# Altium PCB 凌霄底板插座PCB.PcbDoc
Units mil, origin at the board's own origin, x right, y up, seen from the top; angles counter-clockwise.
Board outline 6000 x 4000 mil, 2 copper layers (Top Layer, Bottom Layer); 1 components, 0 nets, 72 pads, 0 vias.
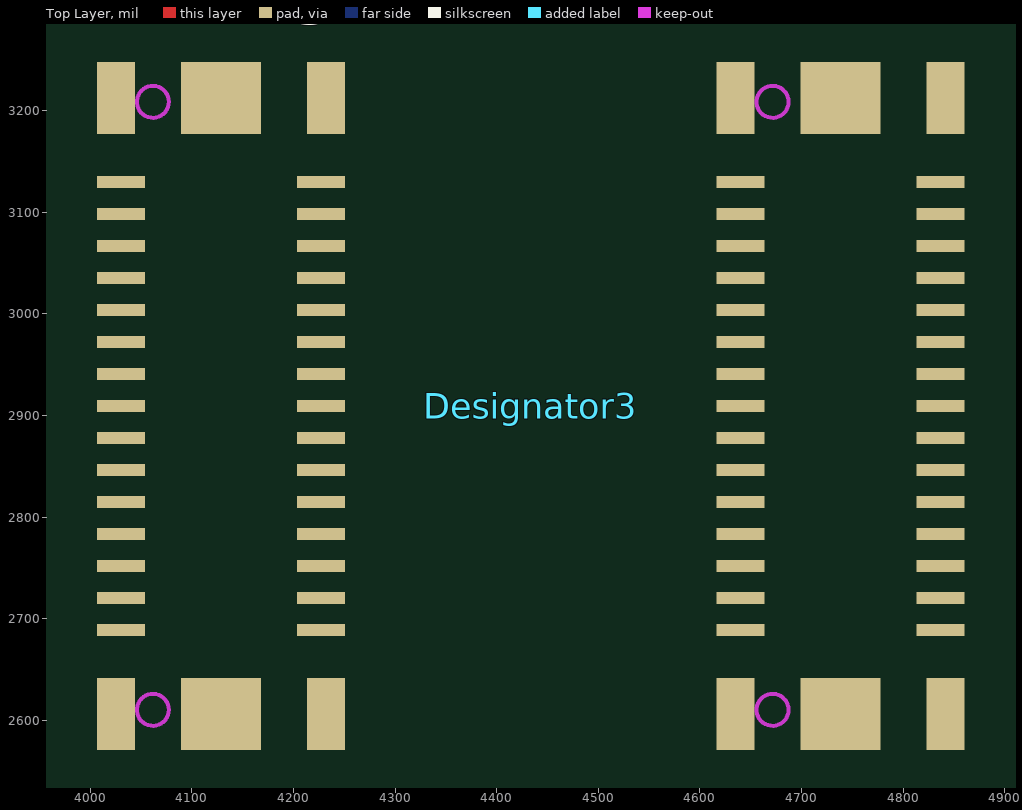
[diagram p0: Top Layer view]
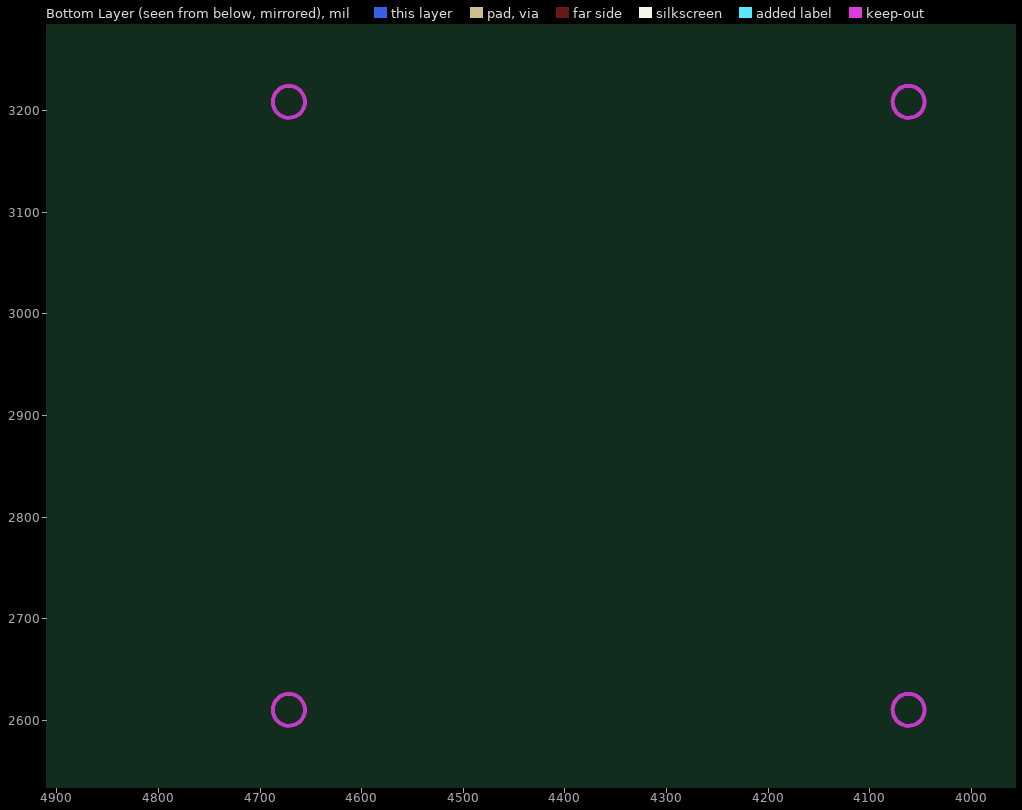
[diagram p1: Bottom Layer view, seen from below]

## Layer stack, top to bottom
Top Solder: solder mask 0.4, Solder Resist, Dk 3.5
Top Layer: signal copper 1.4
Dielectric 1: dielectric 12.6, FR-4, Dk 4.8
Bottom Layer: signal copper 1.4
Bottom Solder: solder mask 0.4, Solder Resist, Dk 3.5

## Board outline
1000,1000 7000,1000 7000,5000 1000,5000

## Design rules (kind name [scope] priority, off if disabled: settings)
Clearance [All] p1: gap=10 ignorepadtopadclearanceinfootprint=FALSE except(0: Arc-Hole Track-Hole SMDPad-Hole THPad-Hole Via-Hole Fill-Hole Poly-Hole Region-Hole Text-Hole)
PolygonConnect [All] p1: connectstyle=Relief reliefconductorwidth=10 reliefentries=4 polygonreliefangle="90 Angle" airgapwidth=10
RoutingVias [All] p1: holewidth=28 width=50 viastyle="Through Hole" minholewidth=28 minwidth=50 maxholewidth=28 maxwidth=50
SolderMaskExpansion [All] p1: expansion=4
Width [All] p1: maxlimit=10 minlimit=10 preferedwidth=10
30 further rules are at their usual default settings.

## Components (designator, comment, footprint, x,y, rotation, side; value= is the part's Value field where it differs from the comment)
Designator3 "Comment" AnoFcMolex_BaseBoard 4435,2905 r0 top

## Footprints (in the part's own frame and the unit in brackets; to place one, negate y for a bottom-side part, rotate by r counter-clockwise, add the part's x,y. Pads: shape width x height; smd on the part's side, far side on the other; paste and mask are expansions set on the pad)
AnoFcMolex_BaseBoard [mm]
  rect 0.95x1.8 smd: 0(-10.408,-7.586) 0(-10.408,7.814) 0(-5.158,-7.586) 0(-5.158,7.814) 0(5.086,-7.586) 0(5.086,7.814) 0(10.336,-7.586) 0(10.336,7.814)
  rect 2x1.8 smd: 0(-7.783,-7.586) 0(-7.783,7.814) 0(7.711,-7.586) 0(7.711,7.814)
  rect 1.2x0.3 smd: 1(-10.283,5.714) 2(-10.283,4.914) 3(-10.283,4.114) 4(-10.283,3.314) 5(-10.283,2.514) 6(-10.283,1.714) 7(-10.283,0.914) 8(-10.283,0.114) 9(-10.283,-0.686) 10(-10.283,-1.486) 11(-10.283,-2.286) 12(-10.283,-3.086) 13(-10.283,-3.886) 14(-10.283,-4.686) 15(-10.283,-5.486) 16(-5.283,-5.486) 17(-5.283,-4.686) 18(-5.283,-3.886) 19(-5.283,-3.086) 20(-5.283,-2.286) 21(-5.283,-1.486) 22(-5.283,-0.686) 23(-5.283,0.114) 24(-5.283,0.914) 25(-5.283,1.714) 26(-5.283,2.514) 27(-5.283,3.314) 28(-5.283,4.114) 29(-5.283,4.914) 30(-5.283,5.714) 31(5.211,5.714) 32(5.211,4.914) 33(5.211,4.114) 34(5.211,3.314) 35(5.211,2.514) 36(5.211,1.714) 37(5.211,0.914) 38(5.211,0.114) 39(5.211,-0.686) 40(5.211,-1.486) 41(5.211,-2.286) 42(5.211,-3.086) 43(5.211,-3.886) 44(5.211,-4.686) 45(5.211,-5.486) 46(10.211,-5.486) 47(10.211,-4.686) 48(10.211,-3.886) 49(10.211,-3.086) 50(10.211,-2.286) 51(10.211,-1.486) 52(10.211,-0.686) 53(10.211,0.114) 54(10.211,0.914) 55(10.211,1.714) 56(10.211,2.514) 57(10.211,3.314) 58(10.211,4.114) 59(10.211,4.914) 60(10.211,5.714)
  Keep-Out Layer circle w0.1: c6.011,-7.486 r0.4
  Keep-Out Layer circle w0.1: c6.011,7.714 r0.4
  Keep-Out Layer circle w0.1: c-9.483,-7.486 r0.4
  Keep-Out Layer circle w0.1: c-9.483,7.714 r0.4

## Nets (pads, with @x,y where several pads share a name; then routed paths per layer and width w, separated by ;. In a path a pad name is that pad's centre, name@x,y a point inside that pad or via, vN(x,y) a via of type N, cw(c..) or ccw(c..) an arc to the next point about the centre after c; other vN are vias at no path point)
pads on no net: Designator3.0 Designator3.1 Designator3.2 Designator3.3 Designator3.4 Designator3.5 Designator3.6 Designator3.7 Designator3.8 Designator3.9 Designator3.10 Designator3.11 Designator3.12 Designator3.13 Designator3.14 Designator3.15 Designator3.16 Designator3.17 Designator3.18 Designator3.19 Designator3.20 Designator3.21 Designator3.22 Designator3.23 Designator3.24 Designator3.25 Designator3.26 Designator3.27 Designator3.28 Designator3.29 Designator3.30 Designator3.31 Designator3.32 Designator3.33 Designator3.34 Designator3.35 Designator3.36 Designator3.37 Designator3.38 Designator3.39 Designator3.40 Designator3.41 Designator3.42 Designator3.43 Designator3.44 Designator3.45 Designator3.46 Designator3.47 Designator3.48 Designator3.49 Designator3.50 Designator3.51 Designator3.52 Designator3.53 Designator3.54 Designator3.55 Designator3.56 Designator3.57 Designator3.58 Designator3.59 Designator3.60